# Allegro board IoT Moudle V2_0_1.brd
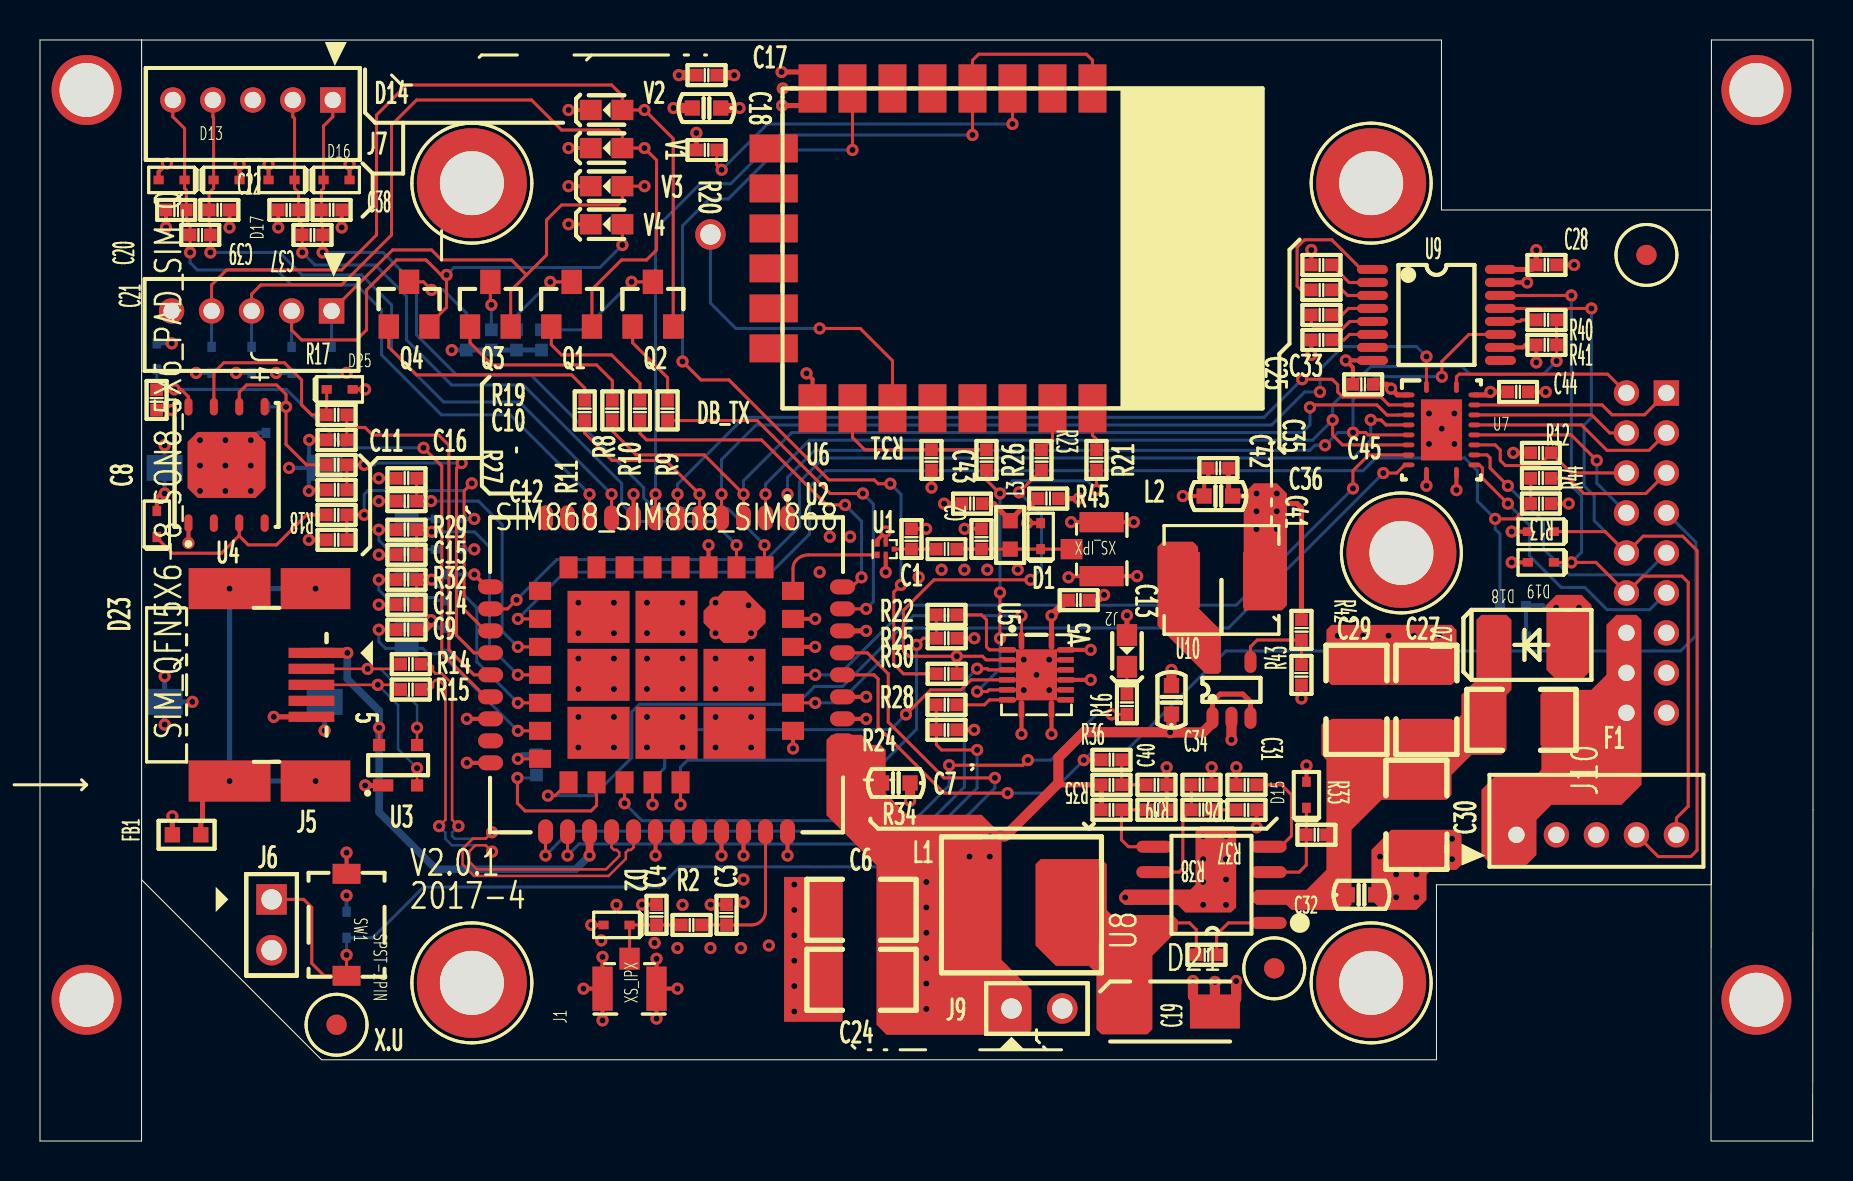
[diagram p0: board, top side]
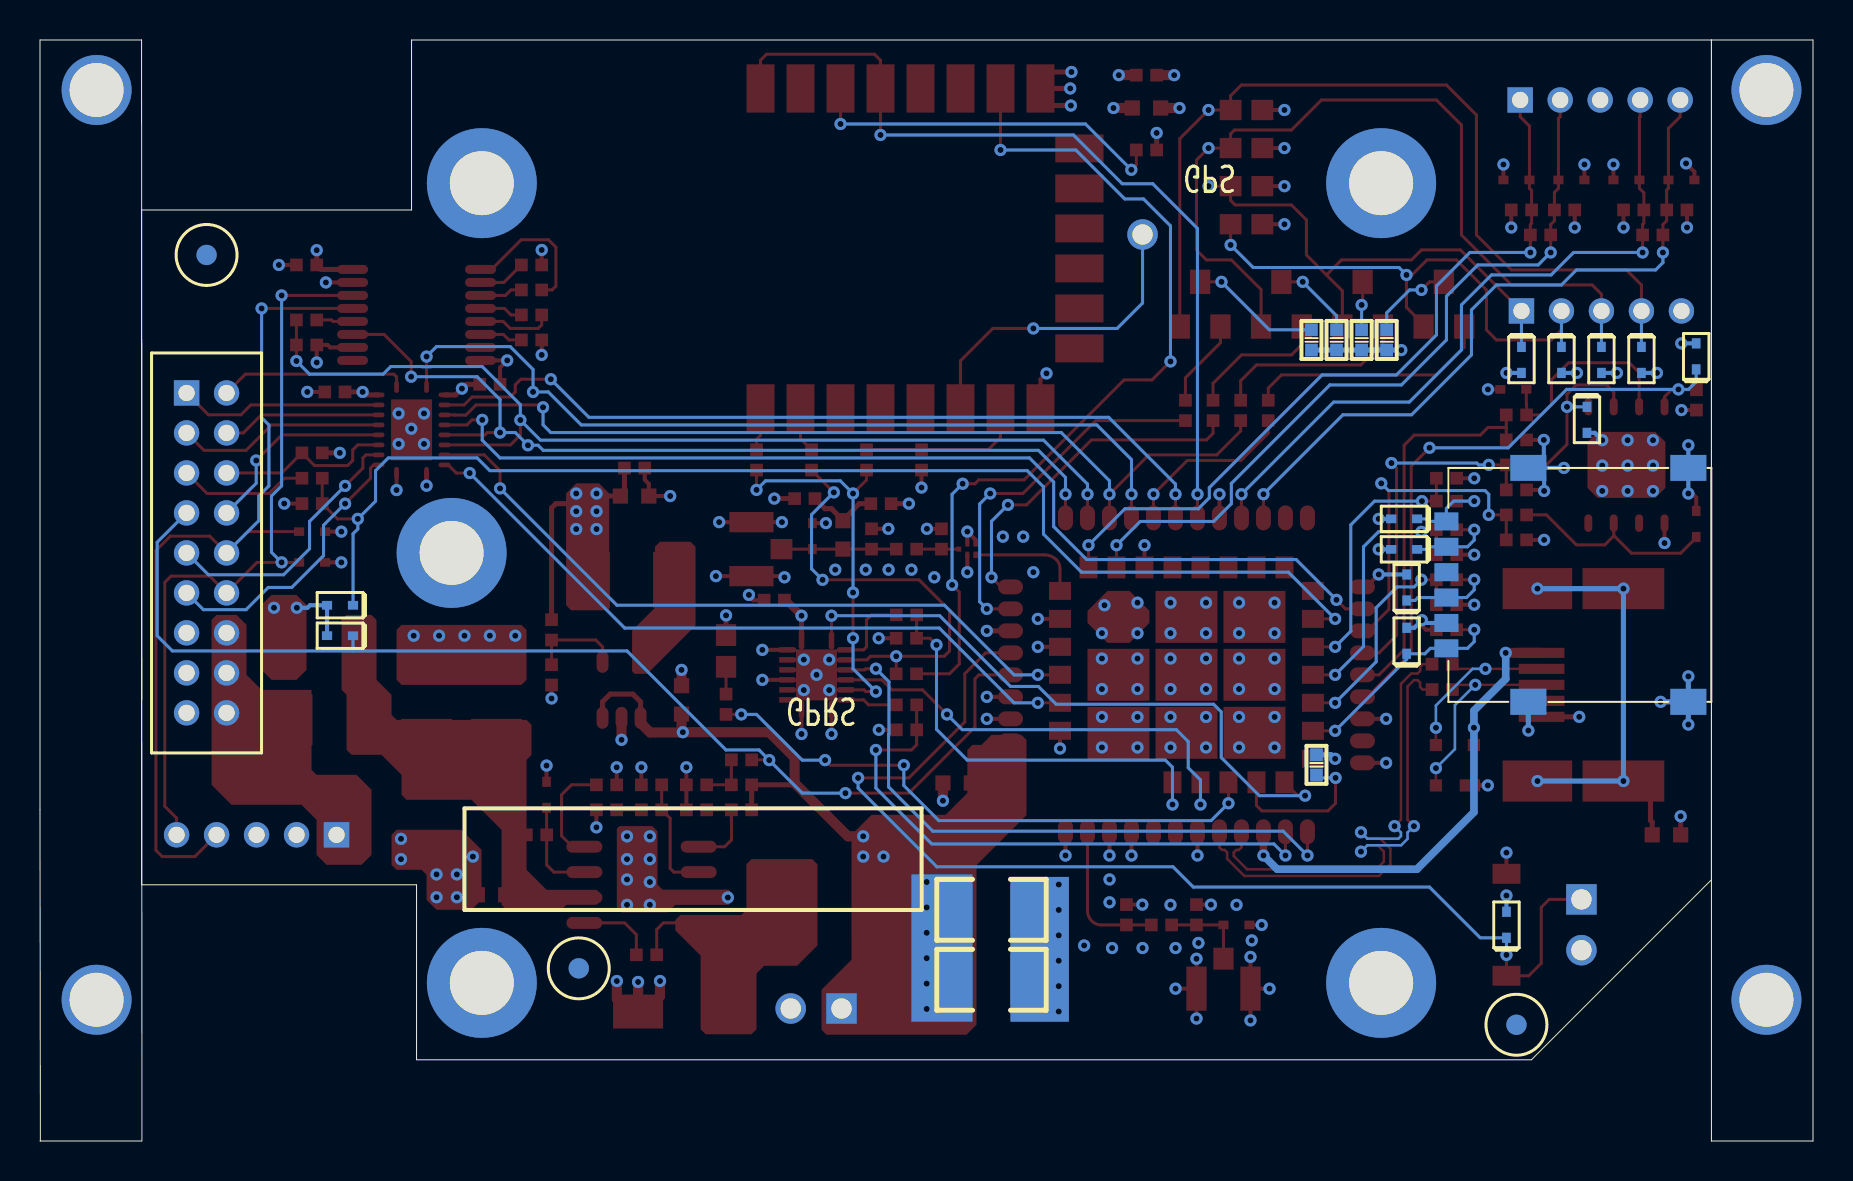
[diagram p1: board, bottom side, seen from below]

Outline 88.66 x 55.07 mm; copper layers: TOP, GND, VCC, BOTTOM. Coordinates in mm from the lower left corner of the outline.
Outline path: 83.57,0 83.58,55.07 88.66,55.07 88.66,16.56 88.65,0 ; 83.58,22.06 83.58,40.06 ; 88.66,0 83.58,0 ; 0,55.07 5.08,55.07 5.08,0 0,0 0,55.07 ; 5.08,55.07 5.08,13.06 14.08,4.06 69.83,4.06 69.83,12.81 83.58,12.81 83.58,46.57 70.08,46.57 70.08,55.07 5.08,55.07

## Design rules (mm)
constraint set DEFAULT: min track width 0.152
net group 1PPS: nets 1PPS N16896165
net group ADC_IN: nets ADC_IN N16862002
net group GPS_EN: nets GPS_EN N16835858
net group GPS_RXD: nets GPS_RXD N16866581
net group GSM_ANT: nets GSM_ANT N16829767
net group J_SIM2_C2: nets J_SIM2_C2 SIM2_RST
net group J_SIM2_C3: nets J_SIM2_C3 SIM2_CLK
net group J_SIM2_C7: nets J_SIM2_C7 SIM2_DATA
net group MIC_N: nets MIC_N MIC_P
net group N10748: nets N10748 N10896
net group N16846415: nets N16846415 N16846419
net group N16846461: nets N16846461 N16846465
net group N16847616: nets N16847616 N16847620
net group N16847724: nets N16847724 N16847850
net group NET_LIGHT: nets N18359 NET_LIGHT
net group PWR_STATUS: nets N18352 PWR_STATUS
net group SIM1_C2: nets SIM1_C2 SIM1_RST
net group SIM1_C3: nets SIM1_C3 SIM1_CLK
net group SIM1_C7: nets SIM1_C7 SIM1_DATA
net group SIM2_DET: nets N16956523 SIM2_DET
net group SPK2_N: nets SPK2_N SPK2_P
net group UART1_DCD: nets N16907222 UART1_DCD
net group UART1_RTS: nets N16906841 UART1_RTS
net group UART1_RX: nets N17025201 UART1_RX
net group UART2_RX: nets N16867085 UART2_RX
net group USB_DM: nets N16842026 USB_DM
net group USB_DP: nets N16842044 USB_DP
net group VCC_IN_F: nets N16847722 VCC_IN_F
net group WIFI_RXD: nets N16887179 N16887271 WIFI_RXD
net group WIFI_TXD: nets N16866018 N16887146 WIFI_TXD
nets with their own width: min track width 0.203; nets GND
nets with their own width: min track width 0.254; nets VCC_2V8 VCC_3V3 VCC_4V VCC_IN

## Placement (name value [footprint] x y rotation side)
C1  270  [C0402]  43.58 30.11 90 top
C2  270  [C0402]  47.08 30.11 90 top
C3  270  [C0402]  34.33 11.31 90 top
C4  270  [C0402]  30.83 11.31 90 top
C5  476  [C1210]  41.08 11.56 180 bottom
C6  476  [C1210]  41.08 11.56 180 top
C7  105  [C0603]  42.8 17.91 180 top
C8  104  [C0402]  5.83 37.07 270 top
C9  104  [C0402]  18.33 25.57 0 top
C10  220  [C0402]  14.83 32.57 0 top
C11  220  [C0402]  14.83 35.07 0 top
C12  220  [C0402]  14.83 30.07 0 top
C13  104  [C0402]  51.94 27.05 0 top
C14  220  [C0402]  18.33 26.82 0 top
C15  220  [C0402]  18.33 29.32 0 top
C16  220  [C0402]  18.33 33.15 0 top
C17  104  [C0402]  33.33 53.31 180 top
C18  106  [C0603]  33.33 51.66 180 top
C19  104  [C0402]  58.33 9.31 180 top
C20  330  [C0402]  6.81 46.57 180 top
C21  120  [C0402]  8.01 45.32 180 top
C22  330  [C0402]  8.97 46.57 0 top
C23  476  [C1210]  41.08 8.06 180 bottom
C24  476  [C1210]  41.08 8.06 180 top
C25  104  [C0402]  64.08 42.57 180 top
C26  104  [C0402]  60.33 17.81 180 top
C27  106  [C1210]  69.33 22.06 90 top
C28  104  [C0402]  75.33 43.82 0 top
C29  106  [C1210]  65.83 22.06 90 top
C30  106  [C1210]  68.83 16.31 270 top
C31  472  [C0402]  58.08 16.56 0 top
C32  104  [C0603]  66.08 12.31 0 top
C33  104  [C0402]  64.08 43.82 180 top
C34  390  [C0402]  58.08 17.81 0 top
C35  104  [C0402]  64.08 41.32 0 top
C36  104  [C0402]  64.08 40.07 180 top
C37  120  [C0402]  13.63 45.32 180 top
C38  330  [C0402]  14.58 46.57 0 top
C39  330  [C0402]  12.42 46.57 180 top
C40  106  [C0603]  56.58 22.06 90 top
C41  106  [C0603]  58.93 32.26 180 top
C42  104  [C0402]  58.93 33.66 180 top
C43  330  [C0402]  46.61 31.88 0 top
C44  104  [C0402]  73.91 37.47 0 top
C45  104  [C0402]  66.17 37.85 180 top
D1  ESD  [SOD-523]  50.04 30.25 90 top
D2  ESD  [SOD-523]  28.83 10.81 180 top
D4  ESD  [SOD-523]  14.58 39.07 270 bottom
D5  ESD  [SOD-523]  12.58 39.07 270 bottom
D6  ESD  [SOD-523]  10.58 39.07 270 bottom
D7  ESD  [SOD-523]  8.58 39.07 270 bottom
D8  ESD  [SOD-523]  20.32 25.02 90 bottom
D9  ESD  [SOD-523]  20.45 31.11 0 bottom
D10  ESD  [SOD-523]  15.33 10.81 90 bottom
D11  ESD  [SOD-523]  20.45 29.59 0 bottom
D12  ESD  [SOD-523]  20.32 27.69 90 bottom
D13  ESD  [SOD-523]  9.33 48.07 0 top
D14  ESD  [SOD-523]  6.58 48.07 180 top
D15  ESD  [SOD-523]  63.33 17.31 90 top
D16  ESD  [SOD-523]  14.83 48.07 0 top
D17  ESD  [SOD-523]  12.08 48.07 180 top
D18  ESD  [SOD-523]  75.06 30.48 180 top
D19  ESD  [SOD-523]  75.06 28.94 180 top
D20  ESD  [SOD-123]  74.58 24.82 0 top
D21  B340A  [SMA]  56.52 6.48 0 top
D22  ESD  [SOD-523]  5.84 39.24 90 bottom
D23  ESD  [SOD-523]  5.84 30.86 90 top
D24  ESD  [SOD-523]  11.3 36.07 270 bottom
D25  ESD  [SOD-523]  14.99 37.59 0 top
D26  ESD  [SOD-523]  73.66 25.27 0.2 bottom
D27  ESD  [SOD-523]  73.66 26.8 0 bottom
F1  SMD200  [F1210]  74.08 21.06 180 top
FB1  BLM18AG331SN1D  [L0603]  7.33 15.31 180 top
J1  XS_IPX  [IPX]  29.48 7.62 90 top
J2  XS_IPX  [IPX]  53.09 29.6 180 top
J3  CON2X9  [CON2X9-2R0-5R5X20]  81.33 37.41 180 bottom
J4  CON5  [CON1X5_2R0_HDR_SIP]  10.58 41.52 270 top
J5  MINI_USB  [CONN_USB_MINI_B_SMD]  9.83 22.81 270 top
J6  PWR_SW  [HDR_1X2]  11.58 12.08 270 top
J7  CON5  [CON1X5_2R0_HDR_SIP]  10.64 52.07 270 top
J9  PWR_SW  [HDR_1X2]  48.58 6.63 0 top
J10  CON5  [CON1X5_2R0_HDR_SIP]  77.83 15.31 90 top
J11  -  [SIM_NANO_12R1X14]  14.23 27.82 90 bottom
L1  6.8uH  [L2525]  49.08 11.81 180 top
L2  4.7uH  [L2020]  59.08 28.07 0 top
L3  27nH  [L0603]  48.51 30.31 90 top
NOREF  -  [unnamed]  14.83 5.81 0 top
NOREF#2  -  [unnamed]  80.33 44.32 0 top
NOREF#3  -  [#2]  67.58 4.06 90 top
NOREF#4  -  [#2]  66.57 7.91 90 top
NOREF#5  -  [#2]  21.6 7.91 90 top
NOREF#6  -  [unnamed#2]  21.6 7.91 0 top
NOREF#7  -  [#2]  0 55.12 0 top
NOREF#8  -  [#2]  21.6 47.91 0 top
NOREF#9  -  [#2]  5.08 14.81 0 top
NOREF#10  -  [unnamed#2]  66.57 47.91 0 top
NOREF#11  -  [#2]  0 0 90 top
NOREF#12  -  [#2]  4.58 66.57 0 top
NOREF#13  -  [unnamed]  21.6 47.91 0 top
NOREF#14  -  [#2]  63.25 4.06 90 top
NOREF#15  -  [#2]  68.08 29.41 0 top
NOREF#16  -  [unnamed]  61.72 8.64 0 top
NOREF#17  -  [#2]  5.08 12.31 0 top
NOREF#18  -  [unnamed]  68.08 29.41 0 top
NOREF#19  -  [unnamed#2]  66.57 7.91 0 top
NOREF#20  -  [unnamed]  80.33 44.32 180 bottom
NOREF#21  -  [unnamed#3]  2.33 52.57 180 bottom
NOREF#22  -  [unnamed]  61.72 8.64 180 bottom
NOREF#23  -  [unnamed#3]  85.83 52.57 180 bottom
NOREF#24  -  [unnamed]  14.83 5.81 180 bottom
NOREF#25  -  [unnamed#3]  2.33 7.06 180 bottom
NOREF#26  -  [unnamed#3]  85.83 7.06 180 bottom
Q1  DTC114TET1G  [SOT-23]  26.59 41.85 0 top
Q2  DTC114TET1G  [SOT-23]  30.65 41.85 0 top
Q3  DTC114TET1G  [SOT-23]  22.52 41.85 0 top
Q4  DTC114TET1G  [SOT-23]  18.46 41.85 0 top
R1  0  [R0402]  45.33 29.6 0 top
R2  0  [R0402]  32.58 10.81 180 top
R3  0  [R0402]  24.83 18.81 270 bottom
R4  102  [R0402]  23.83 40.07 270 bottom
R5  102  [R0402]  21.32 40.07 270 bottom
R6  102  [R0402]  25.08 40.07 270 bottom
R7  102  [R0402]  22.57 40.07 270 bottom
R8  1003  [R0402]  30 36.54 90 top
R9  1003  [R0402]  31.38 36.54 90 top
R10  1003  [R0402]  28.62 36.54 90 top
R11  1003  [R0402]  27.24 36.54 90 top
R12  102  [R0402]  75.06 33.15 0 top
R13  562  [R0402]  75.06 31.88 180 top
R14  220  [R0402]  18.54 23.85 180 top
R15  220  [R0402]  18.54 22.58 180 top
R16  102  [R0402]  54.36 21.84 90 top
R17  51R  [R0402]  14.83 36.32 0 top
R18  51R  [R0402]  14.83 31.32 180 top
R19  51R  [R0402]  14.83 33.82 0 top
R20  102  [R0402]  33.33 49.57 0 top
R21  0  [R0402]  52.83 34.07 270 top
R22  102  [R0402]  45.33 26.32 180 top
R23  0  [R0402]  50.08 34.07 270 top
R24  102  [R0402]  45.33 21.81 0 top
R25  562  [R0402]  45.34 25.15 180 top
R26  0  [R0402]  47.33 34.07 270 top
R27  51R  [R0402]  18.33 32 180 top
R28  562  [R0402]  45.33 20.56 180 top
R29  51R  [R0402]  18.33 30.57 0 top
R30  0  [R0402]  45.34 23.37 180 top
R31  1002  [R0402]  44.58 34.07 90 top
R32  51R  [R0402]  18.33 28.07 0 top
R33  1003  [R0402]  63.83 15.31 0 top
R34  1002  [R0402]  53.58 16.56 180 top
R35  1002  [R0402]  53.58 17.81 180 top
R36  000  [R0402]  53.58 19.06 0 top
R37  4992  [R0402]  60.33 16.56 180 top
R38  2491  [R0402]  55.83 16.56 180 top
R39  1002  [R0402]  55.83 17.81 180 top
R40  102  [R0402]  75.33 41.07 0 top
R41  562  [R0402]  75.33 39.82 0 top
R42  5623  [R0402]  63.08 25.57 270 top
R43  1003  [R0402]  63.08 23.31 90 top
R44  102  [R0402]  75.06 34.42 180 top
R45  100  [R0402]  50.42 32.13 0 top
SW1  SPST-2PIN  [SW_SPST_SMT_4X3X2]  15.33 10.81 270 top
TP1  DB_UART_TX  [TP_KEY_MINI]  33.53 45.34 0 top
U1  SAFFB1G56KB0F0A  [F_1109_5P]  42.29 29.6 180 top
U2  -  [SIM868]  31.33 23.31 270 top
U3  PRTR5V0U2X  [SOT-143B]  17.91 18.8 0 top
U4  SIM_QFN5X6-8  [SON8_5X6_PAD]  9.33 33.82 90 top
U5  SN74CBTLV3257RGY  [PVQFN16_4X3R5_PAD2R05X2R55]  49.83 23.31 270 top
U6  -  [ESP-12F]  49.13 44.64 270 top
U7  TXB0108RGYR  [RGY0020A]  70.08 35.57 0 top
U8  TPS54331D  [SO8N_6R0_1R27]  61.44 10.91 180 top
U9  MAX3232EUE  [SOP16-0R65-6R4]  69.83 41.32 0 top
U10  TPS62200DBV  [SOT23-5]  59.58 22.56 90 top
V1  V_LED  [V0603]  28.33 49.66 0 top
V2  V_LED  [V0603]  28.33 51.57 0 top
V3  V_LED  [V0603]  28.33 47.76 0 top
V4  V_LED  [V0603]  28.33 45.85 0 top
V5  V_LED  [V0603]  54.36 24.51 90 top

## Library data of the parts
C1 C2 = CAP_NP: signal model: DEFAULT_CAPACITOR_4.76e+014pF_2_1
C3 C4 = CAP_NP: signal model: DEFAULT_CAPACITOR_2.2e+014pF_2_1
C5 C7 C9 C11 C42 = CAP_NP: signal model: DEFAULT_CAPACITOR_1.06e+014pF_2_1
C6 C8 C10 C12-C19 C39-C41 = CAP_NP: signal model: DEFAULT_CAPACITOR_1.04e+014pF_2_1
C20-C22 = CAP_NP: signal model: DEFAULT_CAPACITOR_2.7e+014pF_2_1
C23 C24 C27 C29 C35 C36 = CAP_NP: signal model: DEFAULT_CAPACITOR_1.2e+014pF_2_1
C25 C26 C28 C33 C34 C37 C38 = CAP_NP: signal model: DEFAULT_CAPACITOR_3.3e+014pF_2_1
C30 C31 = CAP_NP: signal model: DEFAULT_CAPACITOR_4.77e+014pF_2_1
C32 = CAP_NP: signal model: DEFAULT_CAPACITOR_1.05e+014pF_2_1
C43-C45 = CAP_NP
D1 D2 D4-D20 D22-D27 = DIODE BREAKDOWN
D21 = V_DIODE
F1 = F_FUSE
FB1 R43-R45 = R2
J1 J2 = XS_IPX_0
J3 = XS_CON2X9
J4 J7 J10 = XS_CON5
J5 = XS_MINI_USB
J6 J9 = XS_CON2
J11 = SIM_NANO_10X12
L1 L3 = L
L2 = L: signal model: DEFAULT_INDUCTOR_6.800000nH_2_1
Q1-Q4 = NPN
R1-R5 R18 R20 R22 R24 R28-R33 = R2: signal model: DEFAULT_RESISTOR_102.000000OHM_2_1
R6 R7 R10-R13 R17 R25-R27 R34 R35 = R2: signal model: DEFAULT_RESISTOR_101.000000OHM_2_1
R8 R9 = R2: signal model: DEFAULT_RESISTOR_220.000000OHM_2_1
R14 R15 = R2: signal model: DEFAULT_RESISTOR_472.000000OHM_2_1
R16 R19 R21 R40 = R2: signal model: DEFAULT_RESISTOR_1002OHM_2_1
R23 R36 R37 = R2: signal model: DEFAULT_RESISTOR_0.001OHM_2_1
R38 = R2: signal model: DEFAULT_RESISTOR_5623OHM_2_1
R39 = R2: signal model: DEFAULT_RESISTOR_1003OHM_2_1
R41 = R2: signal model: DEFAULT_RESISTOR_4991OHM_2_1
R42 = R2: signal model: DEFAULT_RESISTOR_2491OHM_2_1
SW1 = S_PUSHBUTTON-SPST-2PIN
TP1 = TP_TEST-POINT
U1 = GPS_BPF_SAFFB1G56KB0F0A
U2 = SIM868
U3 = D_PRTR5V0U2X_0
U4 = SIM_QFN5X6-8
U5 = D_SN74CBTLV3257RGY_0
U6 = D_ESP_12F
U7 = D_TXB0108RGYR
U8 = N_PWR_TPS54331D
U9 = D_TRS_MAX3232EUE
U10 = N_PWR_ADP122_1
V1-V5 = V_LED

## Footprints (pads in the part's own frame, mm; a bottom-side part is the same pattern mirrored in y, then rotated)
C0402
  rect 0.635x0.635 smd: 1(-0.508,0) 2(0.508,0)
C0603
  rect 0.762x0.762 smd: 1(-0.711,0) 2(0.711,0)
C1210
  rect 1.524x2.54 smd: 1(-1.714,0) 2(1.714,0)
CON1X5_2R0_HDR_SIP
  rect 1.27x1.27 hole 0.813: 1(0,4)
  round 1.27 hole 0.813: 2(0,2) 3(0,0) 4(0,-2) 5(0,-4)
CON2X9-2R0-5R5X20
  rect 1.27x1.27 hole 0.813: 1(0,0)
  round 1.27 hole 0.813: 2(0,-1.999) 3(0,-4) 4(0,-6) 5(0,-8.001) 6(0,-10) 7(0,-11.999) 8(0,-14.001) 9(0,-16) 10(1.999,-16) 11(1.999,-14.001) 12(1.999,-11.999) 13(1.999,-10) 14(1.999,-8.001) 15(1.999,-6) 16(1.999,-4) 17(1.999,-1.999) 18(1.999,0)
CONN_USB_MINI_B_SMD
  rect 0.508x2.286 smd: 1(-1.6,3.742) 2(-0.8,3.742) 3(0,3.742) 4(0.8,3.742) 5(1.6,3.742)
  rect 2.057x3.479 smd: 6(4.812,3.949) 8(-4.812,3.949)
  rect 2.057x4.089 smd: 7(4.812,-0.351) 9(-4.812,-0.351)
ESP-12F
  rect 2.413x1.397 smd: 1(-8,3.5) 2(-8,1.5) 3(-8,-0.5) 4(-8,-2.5) 5(-8,-4.5) 6(-8,-6.5) 7(-8,-8.5) 8(-8,-10.5) 15(8,-10.5) 16(8,-8.5) 17(8,-6.5) 18(8,-4.5) 19(8,-2.5) 20(8,-0.5) 21(8,1.5) 22(8,3.5)
  rect 1.397x2.413 smd: 9(-5,-12.445) 10(-3,-12.445) 11(-1,-12.445) 12(1,-12.445) 13(3,-12.445) 14(5,-12.445)
F1210
  rect 1.524x2.54 smd: 1(-1.714,0) 2(1.714,0)
F_1109_5P
  rect 0.25x0.25 smd: 1(-0.425,0)
  rect 0.2x0.325 smd: 2(0,-0.288) 5(0,0.288)
  rect 0.25x0.325 smd: 3(0.425,-0.288) 4(0.425,0.288)
HDR_1X2
  rect 1.524x1.524 hole 1.016: 1(0,0)
  round 1.524 hole 1.016: 2(2.54,0)
IPX
  rect 2.21x1.016 smd: 1(0,1.35) 2(0,-1.35)
  rect 1.092x1.016 smd: 3(1.5,0)
L0603
  rect 0.762x0.762 smd: 1(-0.711,0) 2(0.711,0)
L2020
  rect 1.93x2.794 smd: 1(-2.045,0) 2(2.045,0)
L2525
  rect 3x3.429 smd: 1(-2.52,0) 2(2.52,0)
PVQFN16_4X3R5_PAD2R05X2R55
  custom 0.85x0.28 smd: 1(-1.69,-0.75) 8(1.69,-0.75) 9(1.69,0.75) 16(-1.69,0.75)
  custom 0.28x0.85 smd: 2(-1.25,-1.44) 3(-0.75,-1.44) 4(-0.25,-1.44) 5(0.25,-1.44) 6(0.75,-1.44) 7(1.25,-1.44) 10(1.25,1.44) 11(0.75,1.44) 12(0.25,1.44) 13(-0.25,1.44) 14(-0.75,1.44) 15(-1.25,1.44)
  rect 2.55x2.05 smd: 17(0,0)
R0402
  rect 0.635x0.635 smd: 1(-0.508,0) 2(0.508,0)
RGY0020A
  oval 0.24x0.6 smd: 1(-0.75,2.15) 10(-0.75,-2.15) 11(0.75,-2.15) 20(0.75,2.15)
  oval 0.6x0.24 smd: 2(-1.65,1.75) 3(-1.65,1.25) 4(-1.65,0.75) 5(-1.65,0.25) 6(-1.65,-0.25) 7(-1.65,-0.75) 8(-1.65,-1.25) 9(-1.65,-1.75) 12(1.65,-1.75) 13(1.65,-1.25) 14(1.65,-0.75) 15(1.65,-0.25) 16(1.65,0.25) 17(1.65,0.75) 18(1.65,1.25) 19(1.65,1.75)
  rect 2.05x3.05 smd: 21(0,0)
SIM868
  oval 1.25x0.75 smd: 1(-7.85,6.05) 2(-7.85,4.95) 3(-7.85,3.85) 4(-7.85,2.75) 5(-7.85,1.65) 6(-7.85,0.55) 7(-7.85,-0.55) 8(-7.85,-1.65) 9(-7.85,-2.75) 10(-7.85,-3.85) 11(-7.85,-4.95) 12(-7.85,-6.05) 22(7.85,-6.05) 23(7.85,-4.95) 24(7.85,-3.85) 25(7.85,-2.75) 26(7.85,-1.65) 27(7.85,-0.55) 28(7.85,0.55) 29(7.85,1.65) 30(7.85,2.75) 31(7.85,3.85) 32(7.85,4.95) 33(7.85,6.05)
  oval 0.75x1.25 smd: 13(-4.4,-8.8) 14(-3.3,-8.8) 15(-2.2,-8.8) 16(-1.1,-8.8) 17(0,-8.8) 18(1.1,-8.8) 19(2.2,-8.8) 20(3.3,-8.8) 21(4.4,-8.8) 34(4.4,8.8) 35(3.3,8.8) 36(2.2,8.8) 37(1.1,8.8) 38(0,8.8) 39(-1.1,8.8) 40(-2.2,8.8) 41(-3.3,8.8) 42(-4.4,8.8)
  rect 1.1x0.9 smd: 43(-5.375,4.9) 44(-5.375,3.5) 45(-5.375,2.1) 46(-5.375,0.7) 47(-5.375,-0.7) 48(-5.375,-2.1) 49(-5.375,-3.5) 50(-5.375,-4.9) 58(5.375,-4.9) 59(5.375,-3.5) 60(5.375,-2.1) 61(5.375,-0.7) 62(5.375,0.7)
  rect 0.9x1.1 smd: 51(-4.2,-6.325) 52(-2.8,-6.325) 53(-1.4,-6.325) 54(0,-6.325) 55(1.4,-6.325) 56(2.8,-6.325) 57(4.2,-6.325) 63(2.8,6.325) 64(1.4,6.325) 65(0,6.325) 66(-1.4,6.325) 67(-2.8,6.325) 68(-4.2,6.325)
  rrect 2.6x3.1 smd: 69(-2.9,3.4)
  rect 2.6x3.1 smd: 70(-2.9,0) 71(-2.9,-3.4) 72(0,-3.4) 73(2.9,-3.4) 74(2.9,0) 75(2.9,3.4) 76(0,3.4) 77(0,0)
SIM_NANO_12R1X14
  rect 1.3x1.8 smd: 1(-5.85,0) 2(5.85,0) 3(-5.85,-8) 4(5.85,-8)
  rect 0.9x1.2 smd: C1(-3.175,4.1) C2(-0.635,4.1) C3(1.905,4.1) C5(-1.905,4.1) C6(0.635,4.1) C7(3.175,4.1)
SMA
  rect 2.5x1.7 smd: 1(-2.24,0) 2(2.24,0)
SO8N_6R0_1R27
  oval 1.8x0.6 smd: 1(0,0) 2(0,-1.27) 3(0,-2.54) 4(0,-3.81) 5(5.715,-3.81) 6(5.715,-2.54) 7(5.715,-1.27) 8(5.715,0)
SOD-123
  rect 1.524x2.54 smd: 1(-1.849,0) 2(1.849,0)
SOD-523
  rect 0.508x0.432 smd: 1(-0.65,0) 2(0.65,0)
SON8_5X6_PAD
  oval 0.875x0.4 smd: 1(-2.912,1.905) 2(-2.912,0.635) 3(-2.912,-0.635) 4(-2.912,-1.905) 5(2.912,-1.905) 6(2.912,-0.635) 7(2.912,0.635) 8(2.912,1.905)
  rrect 3.3x3.9 smd: 9(0,0)
SOP16-0R65-6R4
  oval 1.549x0.45 smd: 1(-3.2,2.275) 2(-3.2,1.625) 3(-3.2,0.975) 4(-3.2,0.325) 5(-3.2,-0.325) 6(-3.2,-0.975) 7(-3.2,-1.625) 8(-3.2,-2.275) 9(3.2,-2.275) 10(3.2,-1.625) 11(3.2,-0.975) 12(3.2,-0.325) 13(3.2,0.325) 14(3.2,0.975) 15(3.2,1.625) 16(3.2,2.275)
SOT23-5
  oval 1.1x0.6 smd: 1(-1.4,0.95) 2(-1.4,0) 3(-1.4,-0.95) 4(1.4,-0.95) 5(1.4,0.95)
SOT-23
  rect 1.016x1.219 smd: 1(-1.016,-1.118) 2(1.016,-1.118) 3(0,1.118)
SOT-143B
  rect 1.016x0.61 smd: 1(-0.75,-1.01)
  rect 0.61x0.61 smd: 2(0.95,-1.01) 3(0.95,1.01) 4(-0.95,1.01)
SW_SPST_SMT_4X3X2
  rect 1x1.4 smd: 1(-2.55,0) 2(2.55,0)
TP_KEY_MINI
  round 1.524 hole 1.016: 1(0,0)
unnamed
  round 1.016 smd: 1(0,0)
unnamed#2
  round 5.5 hole 3.2: 1(0,0)
unnamed#3
  round 3.5 hole 2.7: 1(0,0)
V0603
  rect 1.092x1.016 smd: 1(-0.794,0) 2(0.794,0)

## Nets
GND: C1.2 C2.2 C3.2 C4.2 C5.2 C6.2 C7.1 C8.2 C9.2 C10.1 C11.1 C12.1 C13.2 C14.1 C15.1 C16.1 C17.2 C18.2 C20.2 C22.2 C23.2 C24.2 C26.2 C27.2 C28.2 C29.2 C30.2 C32.2 C33.2 C34.2 C36.2 C38.2 C39.2 C40.2 C41.2 C42.2 C43.1 C44.2 C45.2 D1.2 D2.2 D4.2 D5.2 D6.2 D7.2 D8.2 D9.2 D10.2 D11.2 D12.2 D13.2 D14.2 D15.2 D16.2 D17.2 D18.2 D19.2 D20.2 D21.2 D22.2 D23.2 D24.2 D25.2 D26.2 D27.2 FB1.2 J1.1 J1.2 J2.1 J2.2 J3.7 J3.8 J3.9 J4.5 J5.5 J6.2 J7.3 J9.2 J10.2 J10.3 J11.2 J11.4(SHILD4) J11.C5 R13.1 R25.1 R28.1 R31.1 R37.1 R38.1 R39.1 R41.1 R43.1 SW1.1 U1.2 U1.3 U1.5 U2.8 U2.13 U2.19 U2.21 U2.27 U2.30 U2.31 U2.33 U2.36 U2.37 U2.45 U2.63 U2.66 U2.67 U2.69 U2.70 U2.71 U2.72 U2.73 U2.74 U2.75 U2.76 U2.77 U3.1 U4.1 U4.9(PAD) U5.8 U5.9 U5.12 U5.15(\\O\E) U5.17 U6.15 U7.11 U7.21 U8.7 U9.8 U9.10 U9.15 U10.2 V1.1 V2.1 V3.1 V4.1
VCC_2V8: C45.1 U2.40 U7.2 U7.10 V5.2
VCC_3V3: C13.1 C17.1 C18.1 C28.1 C41.1 C42.1 C44.1 L2.2 R4.2 R5.2 R6.2 R7.2 R20.1 R42.1 R44.2 R45.2 U5.16 U6.8(VCC) U7.19(VCCB) U9.16(VCC)
VCC_4V: C5.1 C6.1 C7.2 C23.1 C24.1 C40.1 J9.1 L1.2 R34.2 R35.2 U2.34 U2.35 U10.1(VIN) U10.3
VCC_IN: F1.1 J3.10 J3.11 J3.12 J10.1
VCC_IN_F: C27.1 C29.1 C30.1 C32.1 D20.1(CATHODE) F1.2 R33.2 U8.2
1PPS: R16.1 U2.60
ADC_IN: D26.1(CATHODE) J3.4 R36.1 U2.38
GPS_ANT: U1.4(PORT2) U2.68
GPS_EN: R3.2 U2.59
GPS_RXD: R22.2 R25.2 U2.62
GPS_TXD: U2.61 U5.5
GPS_WIFI_SEL: U2.58 U5.1
GSM_ANT: C3.1 R2.1 U2.32
I2C_SCL: U2.65 U7.8
I2C_SCL_T: J3.5 U7.13
I2C_SDA: U2.64 U7.9
I2C_SDA_T: J3.6 U7.12
J_SIM2_C2: D12.1(CATHODE) J11.C2 R32.1
J_SIM2_C3: D11.1(CATHODE) J11.C3 R29.1
J_SIM2_C7: D9.1(CATHODE) J11.C7 R27.2
LED1: D4.1(CATHODE) J4.1 Q3.2(EMITTER) V3.2
LED2: D5.1(CATHODE) J4.2 Q4.2(EMITTER) V4.2
MIC_N: C20.1 C21.2 D14.1(CATHODE) J7.5 U2.10
MIC_P: C21.1 C22.1 D13.1(CATHODE) J7.4 U2.9
NET_LED: D7.1(CATHODE) J4.4 Q2.2(EMITTER) V2.2
NET_LIGHT: R9.1 U2.41
PWR_LED: D6.1(CATHODE) J4.3 Q1.2(EMITTER) V1.2
PWR_STATUS: R8.1 U2.42
PWRKEY_N: D10.1(CATHODE) J6.1 SW1.2 U2.39
RXD_RS232: D18.1(CATHODE) J3.14 J10.4 U9.13
SIM1_C2: D25.1(CATHODE) R17.1 U4.7
SIM1_C3: D24.1(CATHODE) R19.1 U4.6
SIM1_C7: D23.1(CATHODE) R18.2 U4.3
SIM1_CLK: C10.2 R19.2 U2.16
SIM1_DATA: C12.2 R18.1 U2.15
SIM1_DET: U2.14 U7.5
SIM1_DET_T: J3.2 U7.16
SIM1_RST: C11.2 R17.2 U2.17
SIM1_VDD: C8.1 D22.1(CATHODE) U2.18 U4.8
SIM2_CLK: C15.2 R29.2 U2.54
SIM2_DATA: C16.2 R27.1 U2.53
SIM2_DET: D27.1(CATHODE) R12.1 R13.2 U2.52
SIM2_RST: C14.2 R32.2 U2.55
SIM2_VDD: C9.1 D8.1(CATHODE) J11.C1 U2.56
SPK2_N: C37.1 C38.1 D16.1(CATHODE) J7.1 U2.43
SPK2_P: C37.2 C39.1 D17.1(CATHODE) J7.2 U2.44
TXD_RS232: D19.1(CATHODE) J3.13 J10.5 U9.14
UART1_CTS: U2.4 U7.1
UART1_CTS_T: J3.18 U7.20
UART1_DCD: R11.1 U2.5
UART1_DTR: U2.6 U7.3
UART1_DTR_T: J3.1 U7.18
UART1_RTS: R10.1 U2.3 U7.4
UART1_RTS_T: J3.17 U7.17
UART1_RX: R40.2 R41.2 U2.2 U7.7
UART1_RX_T: J3.16 R44.1 U7.14
UART1_TX: U2.1 U7.6 U9.11
UART1_TX_T: J3.15 U7.15
UART2_RX: R24.1 R28.2 U2.23
UART2_TX: U2.22 U5.4
USB_DM: R14.1 U2.26
USB_DP: R15.1 U2.25
USB_VBUS: J5.1 U2.24 U3.4(VCC)
WIFI_RST: U2.7 U6.1 U6.4
WIFI_RXD: R23.2 R30.1 U5.3
WIFI_TXD: R21.2 R26.2 U5.6
N10748: C1.1 R1.1 U1.1
N10896: C2.1 D1.1(CATHODE) J2.3 L3.1 R1.2
N18352: Q1.1 R8.2
N18359: Q2.1 R9.2
N18758: Q1.3 R4.1
N18762: Q2.3 R6.1
N16829767: C4.1 D2.1(CATHODE) J1.3 R2.2
N16835858: R3.1 U2.57
N16842007: FB1.1 J5.6 J5.7 J5.8 J5.9
N16842026: J5.2 R14.2 U3.3
N16842044: J5.3 R15.2 U3.2
N16846415: C25.1 U9.3
N16846419: C25.2 U9.1
N16846439: C33.1 U9.2
N16846461: C35.1 U9.5
N16846465: C35.2 U9.4
N16846467: C36.1 U9.6
N16847010: R20.2 U6.3
N16847616: C19.1 U8.1
N16847620: C19.2 D21.1(K) L1.1 U8.8
N16847722: D15.1(CATHODE) R33.1 U8.3
N16847724: C31.1 C34.1 U8.6
N16847764: C26.1 U8.4
N16847768: R34.1 R38.2 U8.5(VSENSE)
N16847850: C31.2 R37.2
N16848391: L2.1 U10.5
N16848451: R42.2 R43.2 U10.4
N16862002: R35.1 R36.2 R39.2
N16866018: R26.1 R31.2 U6.16
N16866581: R22.1 U5.2
N16867085: R24.2 U5.7
N16887146: R21.1 U6.22
N16887179: R23.1 U6.21
N16887271: R30.2 U6.7
N16887852: TP1.1(TP) U6.17
N16896165: R16.2 V5.1
N16906839: Q3.3 R7.1
N16906841: Q3.1 R10.2
N16907220: Q4.3 R5.1
N16907222: Q4.1 R11.2
N16956523: J3.3 R12.2
N17025201: R40.1 U9.12
N17037446: C43.2 L3.2 R45.1

Pads without a net: J5 4; J11 1 3 C6; NOREF 1; NOREF#2 1; NOREF#6 1; NOREF#10 1; NOREF#13 1; NOREF#16 1; NOREF#18 1; NOREF#19 1; NOREF#20 1; NOREF#21 1; NOREF#22 1; NOREF#23 1; NOREF#24 1; NOREF#25 1; NOREF#26 1; U2 11 12 20 28 29 46 47 48 49 50 51; U4 2 4 5; U5 10 11 13 14; U6 2 5 6 9 10 11 12 13 14 18 19 20; U9 7 9

## Via types
v1: diameter 0.61, hole 0.305, TOP to BOTTOM, 363 vias

## Routing (per net, layer and track width the routed paths; a pad name or vN(x,y) marks a point on that pad's centre or on a via; arc(x,y) is an arc through that point)
GND: length 157
  TOP w0.203: D25.2 v1(16.26,37.59) ; U2.66 v1(38.77,24.71) ; V2.1 v1(26.43,51.57) ; U5.8 v1(49.08,20.36) ; R13.1 v1(76.45,31.88) ; U1.5 42.29,28.45 v1(42.29,28.45) ; C26.2 v1(59.82,18.69) ; C1.2 v1(44.31,30.62) ; R37.1 v1(60.84,15.69) ; v1(51.43,28.19) 51.49,28.25 J2.1 v1(54.86,28.25) ; U2.27 v1(30.78,14.28) ; U2.13 22.34,27.71 v1(21.72,28.34) ; C11.1 v1(13.46,35.07) ; U5.9 v1(50.58,20.36) ; C33.2 v1(63.57,44.57) ; R25.1 v1(46.72,25.15) ; D19.2 v1(73.59,28.94) ; U1.2 v1(42.29,30.48) 41.87,30.06 U1.3 ; U2.21 v1(21.35,18.91) ; C28.2 v1(76.72,43.82) ; U6.15 38.63,38.09 v1(38.33,38.39) ; v1(30.83,6.13) J1.2 ; J1.2 v1(30.83,9.11) ; J1.2 v1(31.88,7.62) ; C39.2 v1(11.91,45.69) ; v1(51.56,30.95) J2.2 v1(54.7,30.95) ; C45.2 65.66,38.68 v1(65.3,39.04) U9.8 ; C15.1 v1(16.94,29.32) ; v1(56.34,18.69) R39.1 R38.1 ; U2.30 v1(34.08,14.28) ; C36.2 v1(63.57,39.32) ; C14.1 v1(16.94,26.82) ; D18.2 v1(73.59,30.48) ; J1.1 v1(27.18,7.62) ; J1.1 v1(28.13,6.03) ; J1.1 v1(28.13,9.21) ; V4.1 v1(26.43,45.85) ; U2.45 v1(33.43,29.8) ; D14.2 5.93,48.48 v1(6.35,48.9) ; D1.2 v1(49.36,30.9) ; V3.1 v1(26.43,47.76) ; C34.2 v1(58.59,18.69) ; D23.2 5.84,32.18 6.05,32.39 v1(6.23,32.39) ; v1(19.56,26.05) 19.56,25.78 19.35,25.57 C9.2 ; U2.31 v1(35.18,14.28) ; v1(74.83,38.94) R41.1 74.28,39.82 74.15,39.69 U9.10 ; C20.2 v1(6.3,45.69) ; U2.8 v1(29.68,32.35) ; C13.2 53.01,27.05 53.21,27.25 v1(53.21,27.31) ; U9.15 v1(74.37,42.94) ; SW1.1 v1(15.33,14.42) ; U2.33 v1(37.38,14.28) ; U2.67 v1(38.77,26.11) ; C4.2 v1(30.11,11.82) ; U7.11 v1(70.83,32.56) ; C10.1 13.5,32.57 v1(13.45,32.51) ; U5.12 v1(52.54,23.06) ; D2.2 v1(27.57,10.81) ; U2.63 v1(37.66,19.63) ; R28.1 v1(46.72,20.56) ; D13.2 v1(9.98,48.84) ; R43.1 v1(63.08,22.13) ; U5.15 v1(52.54,24.56) ; C12.1 v1(13.45,30.07) ; U2.36 v1(41.32,21.11) ; C42.2 58.42,33.07 58.22,32.87 C41.2 v1(57.15,32.26) ; C16.1 v1(16.94,33.15) ; V1.1 v1(26.43,49.66) ; U2.19 v1(21.35,21.11) ; R31.1 v1(44.58,32.68) ; D17.2 v1(11.43,48.84) ; U4.1 v1(7.43,29.91) ; U2.37 v1(41.32,22.21) ; D16.2 v1(15.48,48.84) ; D15.2 v1(63.33,18.78) ; C44.2 v1(75.3,37.47) ; C38.2 v1(15.09,45.69) ; C22.2 v1(9.48,45.69) ; C8.2 v1(6.58,36.56) ; C3.2 v1(33.54,11.82) ; C2.2 v1(46.24,30.62)
  TOP w0.254: C43.1 v1(45.21,31.88) ; FB1.2 v1(6.62,16.24) ; U3.1 v1(16.26,17.79) ; J5.5 v1(11.69,21.22)
  TOP w0.508: v1(57.66,8) 57.66,7.24 58.42,6.48 D21.2 ; U8.7 v1(54.27,12.18) ; C17.2 v1(31.95,53.31) ; C18.2 v1(31.68,51.66) ; C7.1 v1(43.51,17.02) ; D21.2 v1(58.76,7.96) ; D21.2 59.18,6.48 59.82,7.11 v1(59.82,8) ; U10.2 v1(59.58,20.07) ; C40.2 v1(56.58,23.56)
  GND w0.203: 50.18,6.63 J9.2 ; J9.2 51.12,5.69 ; J9.2 52.06,6.63 ; J9.2 51.12,7.57 ; J6.2 11.58,10.48 ; J6.2 11.58,8.6 ; J6.2 12.52,9.54 ; J6.2 10.64,9.54 ; J3.7 81.33,26.16 ; J3.7 82.08,25.42 ; J3.7 81.33,24.67 ; J3.7 80.58,25.42 ; 75.08,15.31 J10.2 ; J10.2 76.58,15.31 ; J10.2 75.83,16.06 ; J10.2 75.83,14.57 ; J7.3 10.64,52.82 ; J7.3 10.64,51.32 ; J7.3 9.89,52.07 ; J7.3 11.39,52.07 ; J4.5 6.58,42.27 ; J4.5 6.58,40.77 ; J4.5 7.33,41.52 ; 80.58,21.41 J3.9 ; J3.9 81.33,22.16 ; J3.9 82.08,21.41 ; J3.9 81.33,20.67 ; J3.8 82.08,23.41 ; J3.8 81.33,22.66 ; J3.8 81.33,24.16 ; J3.8 80.58,23.41 ; 77.08,15.31 J10.3 ; J10.3 77.83,14.57 ; J10.3 78.58,15.31 ; J10.3 77.83,16.06
  BOTTOM w0.203: v1(6.23,34.8) J11.4 v1(6.23,32.39) ; 13.98,33.67 13.46,33.15 13.46,33.11 13.45,33.1 v1(13.45,32.51) ; 13.98,33.67 13.96,33.67 ; 13.98,33.67 J11.2 ; D26.2 D27.2 75.16,26.8 75.29,26.67 v1(75.82,26.67) ; 13.96,33.67 13.46,34.16 v1(13.46,35.07) ; 13.96,33.67 v1(12.46,33.67) ; D24.2 10.91,35.42 v1(10.54,35.05) ; D5.2 v1(11.81,38.42) ; D6.2 v1(9.81,38.42) ; D22.2 v1(6.59,39.89) ; D11.2 v1(21.72,29.59) ; D12.2 v1(21.72,28.34) ; D8.2 19.94,25.67 v1(19.56,26.05) 19.42,25.91 J11.C5 ; D7.2 v1(7.81,38.42) ; D9.2 v1(21.72,31.11) ; D4.2 v1(15.33,38.42) ; D10.2 v1(15.33,12.28)
  vias: v1(8,35.05) v1(8,33.78) v1(8,32.51) v1(9.27,35.05) v1(9.27,33.78) v1(9.27,32.51) v1(10.54,33.78) v1(10.54,32.51) v1(26.92,26.92) v1(26.92,25.4) v1(26.92,24.13) v1(26.92,22.61) v1(26.92,21.21) v1(26.92,19.69) v1(28.07,10.03) v1(28.7,26.92) v1(28.7,25.4) v1(28.7,24.13) v1(28.7,22.61) v1(28.7,21.21) v1(28.7,19.69) v1(28.83,11.81) v1(30.35,26.92) v1(30.35,25.4) v1(30.35,24.13) v1(30.35,22.61) v1(30.35,21.21) v1(30.35,19.69) v1(30.73,9.91) v1(31.88,9.65) v1(32.13,26.92) v1(32.13,25.4) v1(32.13,24.13) v1(32.13,22.61) v1(32.13,21.21) v1(32.13,19.69) v1(32.13,11.81) v1(33.53,9.65) v1(33.78,26.92) v1(33.78,25.4) v1(33.78,24.13) v1(33.78,22.61) v1(33.78,21.21) v1(33.78,19.69) v1(35.05,9.65) v1(35.18,13.08) v1(35.18,11.94) v1(35.43,26.8) v1(35.56,25.4) v1(35.56,24.13) v1(35.56,22.61) v1(35.56,21.21) v1(35.56,19.69) v1(36.45,9.78) v1(37.72,12.83) v1(37.72,11.56) v1(37.72,10.29) v1(37.72,9.02) v1(37.72,7.75) v1(37.72,6.48) v1(38.99,28.45) v1(39.5,30.23) v1(40.51,30.23) v1(43.94,28.19) v1(45.09,28.57) v1(46.23,28.57) v1(47.37,28.57) v1(48.89,28.57) v1(49.2,24.08) v1(49.2,22.55) v1(49.83,23.31) v1(50.47,24.08) v1(50.47,22.55) v1(58.17,15.24) v1(58.17,14.1) v1(58.17,12.95) v1(58.17,11.81) v1(59.31,15.24) v1(59.31,14.1) v1(59.31,13.08) v1(59.31,11.81) v1(64.9,25.27) v1(66.17,25.27) v1(67.01,14.22) v1(67.44,25.27) v1(67.82,13.34) v1(67.82,12.19) v1(68.71,25.27) v1(68.83,13.34) v1(68.83,12.19) v1(69.46,36.39) v1(69.46,34.86) v1(69.98,25.27) v1(70.1,35.63) v1(70.61,15.11) v1(70.61,14.1) v1(70.73,36.39) v1(70.73,34.86) v1(76.96,26.67)
VCC_2V8: length 43.3
  TOP w0.254: C45.1 67.35,37.85 v1(67.56,37.63) 67.88,37.32 U7.2 ; U7.10 v1(69.33,32.77) ; V5.2 v1(54.36,26.29) ; U2.40 v1(41.32,25.51)
  VCC w0.381: 66.87,35.25 63.88,32.26 63.88,28.7 61.47,26.29 v1(54.36,26.29) 51.56,26.29 50.8,27.05 48.77,27.05 48.26,26.54 42.34,26.54 v1(41.32,25.51) ; 66.87,35.25 67.56,35.94 v1(67.56,37.63) ; 66.87,35.25 67.31,34.81 67.31,34.8 v1(69.33,32.77)
VCC_3V3: length 31.1
  TOP w0.254: v1(60.83,32.39) 60.71,32.26 C41.1 59.44,32.46 C42.1 ; v1(37.08,53.47) 38.23,53.47 38.63,53.06 U6.8 ; v1(37.11,51.79) 38.45,51.79 38.63,51.97 U6.8 ; C44.1 v1(72.53,37.47) 72.38,37.32 U7.19 ; U9.16 74.6,43.59 C28.1 v1(74.83,44.55) ; R42.1 63.08,31.66 62.86,31.88 62.1,31.88 ; U6.8 v1(37.15,52.64) ; U5.16 v1(50.58,26.27) ; R20.1 v1(32.82,50.42) ; 74.55,34.42 v1(73.67,34.42) ; R45.2 v1(51.94,32.13)
  TOP w0.381: C13.1 51.36,27.05 v1(50.58,26.27)
  TOP w0.508: C17.1 v1(34.72,53.31) ; C18.1 v1(34.98,51.66)
  BOTTOM w0.254: v1(20.59,39.56) R5.2 R7.2 R4.2 R6.2
  vias: v1(60.83,31.5) v1(60.83,30.61) v1(61.85,32.39) v1(61.85,31.5) v1(61.85,30.61)
VCC_4V: length 22.6
  TOP w0.254: U10.3 60.53,21.97 60.15,22.35 59.02,22.35 58.63,21.97 U10.1 ; 50.93,17.91 51.02,17.81 R35.2 R34.2
  TOP w0.508: 56.58,20.51 v1(56.52,20.45) 52.2,20.45 50.93,19.18 50.93,17.91 48.26,15.24 v1(47.5,15.24) ; 56.58,20.51 56.66,20.43 58.15,20.43 58.63,20.91 U10.1 ; 56.58,20.51 C40.1
  vias: v1(44.32,12.95) v1(44.32,11.68) v1(44.32,10.41) v1(44.32,9.14) v1(44.32,7.87) v1(44.32,6.6) v1(46.48,14.22) v1(47.5,14.22)
1PPS: length 29.3
  TOP w0.152: v1(49.4,19.05) 49.15,18.8 v1(45.47,18.8) ; v1(53.59,21.34) R16.1 ; U2.60 v1(29.23,16.89)
  BOTTOM w0.152: v1(45.47,18.8) 45.47,17.78 43.71,16.02 30.1,16.02 v1(29.23,16.89) ; v1(49.4,19.05) 50.55,19.05 52.83,21.34 v1(53.59,21.34)
ADC_IN: length 58.2
  TOP w0.152: U2.38 41.71,23.31 41.91,23.11 41.91,20.7 45.21,17.4 v1(48.39,17.4) ; v1(52.2,19.05) 52.21,19.06 R36.1
  BOTTOM w0.152: D26.1 73.01,24.53 73.02,24.51 ; J3.4 82.8,29.94 82.8,25.27 82.04,24.51 73.02,24.51 ; 73.02,24.51 59.31,24.51 54.36,19.56 52.7,19.56 v1(52.2,19.05) 50.55,17.4 v1(48.39,17.4)
GPS_ANT: length 5.7
  TOP w0.152: U1.4 38.44,29.32 arc(38.11,29.25) 37.83,29.07 arc(37.7,28.87) 37.66,28.64 U2.68
GPS_EN: length 7.7
  TOP w0.152: U2.59 27.83,16.78 27.56,16.51 24.26,16.51 23.88,16.89 v1(23.88,18.16)
  BOTTOM w0.152: R3.2 24.69,18.16 v1(23.88,18.16)
GPS_RXD: length 22.1
  TOP w0.152: R22.2 R25.2 44.16,25.15 v1(43.83,24.82) ; U2.62 v1(32.03,16.83)
  BOTTOM w0.152: v1(32.03,16.83) 32.03,18.7 32.38,19.05 42.29,19.05 43.83,20.59 v1(43.83,24.82)
GPS_TXD: length 22.9
  TOP w0.152: v1(43.31,21.34) 44.54,22.56 46.06,22.56 46.56,23.06 U5.5 ; U2.61 v1(30.63,16.83)
  BOTTOM w0.152: v1(43.31,21.34) 42.55,20.57 31.84,20.57 31.24,19.98 31.24,18.67 30.63,18.06 v1(30.63,16.83)
GPS_WIFI_SEL: length 31.3
  TOP w0.152: U2.58 25.76,17.27 v1(25.4,17.27) ; U5.1 v1(49.08,26.27)
  BOTTOM w0.152: v1(49.08,26.27) 43.67,26.27 40.13,22.73 38.73,22.73 37.85,21.84 29.97,21.84 29.59,21.46 29.59,19.18 27.69,17.27 v1(25.4,17.27)
GSM_ANT: length 7.6
  TOP w0.152: U2.32 36.28,11.51 arc(36.08,11.01) 35.58,10.81 C3.1 R2.1
I2C_SCL: length 35.9
  TOP w0.152: v1(65.66,32.64) 65.66,33.53 66.45,34.32 U7.8 ; U2.65 v1(38.77,23.31)
  BOTTOM w0.152: v1(65.66,32.64) 59.81,26.8 43.43,26.8 39.95,23.31 v1(38.77,23.31)
I2C_SCL_T: length 13.6
  TOP w0.152: U7.13 72.36,34.32 72.52,34.16 72.52,33.66 v1(73.41,32.77)
  BOTTOM w0.152: v1(73.41,32.77) 75.18,30.99 75.18,29.62 76.48,28.32 80.24,28.32 J3.5
I2C_SDA: length 35.7
  TOP w0.152: U2.64 v1(38.77,21.91) ; U7.9 68.25,33.82 67.85,33.41 v1(67.18,33.41)
  BOTTOM w0.152: v1(67.18,33.41) 59.42,25.65 43.69,25.65 39.95,21.91 v1(38.77,21.91)
I2C_SDA_T: length 14.1
  TOP w0.152: v1(73.41,31.88) 72.14,33.15 72.14,33.66 71.98,33.82 U7.12
  BOTTOM w0.152: J3.6 80.49,26.58 78.36,26.58 77.25,27.69 76.07,27.69 74.49,29.27 74.49,30.8 v1(73.41,31.88)
J_SIM2_C2: length 5
  TOP w0.152: R32.1 v1(16.94,28.07)
  BOTTOM w0.152: v1(16.94,28.07) 16.94,27.57 17.33,27.18 J11.C2 19.76,27.18 19.9,27.04 D12.1
J_SIM2_C3: length 4.4
  TOP w0.152: R29.1 v1(16.94,30.57)
  BOTTOM w0.152: D11.1 19.3,29.59 19.17,29.72 J11.C3 17.28,29.72 16.94,30.05 v1(16.94,30.57)
J_SIM2_C7: length 4.6
  TOP w0.152: R27.2 v1(16.94,32)
  BOTTOM w0.152: v1(16.94,32) 17.97,32 18.33,31.64 J11.C7 19.21,30.99 19.34,31.11 D9.1
LED1: length 25.4
  TOP w0.152: J4.1 17.63,44.57 19.58,44.57 20.08,44.07 23.58,44.07 24.33,43.32 ; Q3.2 23.54,42.52 24.33,43.32 ; 24.33,43.32 25.33,44.32 25.33,46.07 26.08,46.82 28.9,46.82 29.12,47.05 V3.2 v1(30.23,47.76)
  BOTTOM w0.152: D4.1 14.58,40.17 14.58,40.17 J4.1
LED2: length 27.2
  TOP w0.152: Q4.2 19.47,40.84 20.33,41.69 v1(20.33,43.32) 20.06,43.32 19.31,44.07 17.83,44.07 16.33,42.57 16.33,40.57 15.83,40.07 13.08,40.07 12.58,40.57 J4.2 ; V4.2 v1(29.12,44.82)
  BOTTOM w0.152: J4.2 12.58,40.17 12.58,40.17 D5.1 ; v1(20.33,43.32) 20.7,43.69 28,43.69 v1(29.12,44.82)
MIC_N: length 35.8
  TOP w0.152: J7.5 6.64,51.23 7.23,50.64 D14.1 7.23,47.65 7.32,47.56 C20.1 7.32,46.02 7.51,45.84 C21.2 v1(7.51,44.44) ; U2.10 v1(27.48,32.35)
  BOTTOM w0.152: v1(7.51,44.44) 7.51,43.93 7.87,43.57 11.83,43.57 12.58,42.82 15.83,42.82 17.08,41.57 17.08,39.32 20.07,36.32 23.51,36.32 v1(27.48,32.35)
MIC_P: length 35.3
  TOP w0.152: U2.9 v1(28.58,32.35) ; J7.4 8.64,51.23 8.68,51.19 D13.1 8.68,47.65 8.46,47.43 C22.1 8.46,45.9 8.52,45.84 C21.1 v1(8.52,44.44)
  BOTTOM w0.152: v1(8.52,44.44) 11.97,44.44 13.1,43.32 16.08,43.32 17.58,41.82 17.58,39.57 20.19,36.96 23.97,36.96 v1(28.58,32.35)
Net_116: length 1.4
  BOTTOM w0.254: 14.23,21.97 v1(14.23,20.53)
Net_117: length 3.8
  BOTTOM w0.254: 6.23,21.97 v1(6.23,23.24) ; 6.23,21.97 v1(7.62,21.97) ; 6.23,21.97 v1(6.23,20.83)
NET_LED: length 44.8
  TOP w0.152: Q2.2 31.67,50.13 v1(30.23,51.57) V2.2 29.12,52.28 28.59,52.82 18.33,52.82 16.83,51.32 16.83,45.32 15.08,43.57 9.33,43.57 8.58,42.82 J4.4
  BOTTOM w0.152: D7.1 8.58,40.17 8.58,40.17 J4.4 8.58,41.57
NET_LIGHT: length 18.6
  TOP w0.152: R9.1 35.86,36.03 39.51,32.39 v1(41.15,32.39) ; U2.41 v1(41.32,26.61)
  BOTTOM w0.152: v1(41.15,32.39) 41.67,31.86 41.67,26.97 v1(41.32,26.61)
PWR_LED: length 42.2
  TOP w0.152: Q1.2 27.6,42.59 29.08,44.07 30.33,44.07 30.83,44.57 30.83,49.06 v1(30.23,49.66) V1.2 29.12,50.37 28.93,50.57 26.08,50.57 24.58,52.07 18.83,52.07 17.58,50.82 17.58,45.32 15.08,42.82 11.04,42.82 10.58,42.35 J4.3
  BOTTOM w0.152: D6.1 J4.3
PWR_STATUS: length 17.5
  TOP w0.152: v1(41.08,28.19) 40.6,27.71 U2.42 ; R8.1 30,35.39 30.33,35.07 36.08,35.07 39.33,31.82 v1(40.26,31.82)
  BOTTOM w0.152: v1(41.08,28.19) 41.08,30.99 v1(40.26,31.82)
PWRKEY_N: length 56.5
  TOP w0.152: J6.1 13.19,12.08 13.59,11.68 13.59,8.89 14.21,8.26 SW1.2 v1(15.33,9.31) ; U2.39 41.37,24.41 42.42,23.37 42.42,20.95 45.21,18.16 v1(47.75,18.16)
  BOTTOM w0.152: v1(47.75,18.16) 47.75,17.65 43.81,13.72 32,13.72 30.99,12.7 19.18,12.7 16.64,10.16 D10.1 v1(15.33,9.31)
RXD_RS232: length 44.7
  TOP w0.152: D18.1 78.27,30.48 J3.14 80.17,30.25 82.14,30.25 82.87,29.53 82.87,14.54 82.55,14.22 80.92,14.22 J10.4 ; U9.13 v1(77.58,41.64)
  BOTTOM w0.152: v1(77.58,41.64) 77.58,36.18 77.22,35.81 77.22,32.77 77.72,32.26 77.72,31.02 J3.14
SIM1_C2: length 10.6
  TOP w0.152: D25.1 14.34,36.85 14.32,36.84 R17.1 13.58,36.32 13.08,36.82 13.08,38.07 12.22,38.92 9.19,38.92 8.7,38.43 U4.7
SIM1_C3: length 9.4
  TOP w0.152: R19.1 13.33,33.82 12.3,34.84 v1(12.3,36.72) 12.3,37.34 11.83,37.82 10.33,37.82 9.97,37.45 U4.6
  BOTTOM w0.152: D24.1 v1(12.3,36.72)
SIM1_C7: length 10.6
  TOP w0.152: D23.1 5.84,30.17 6.62,29.4 9.08,29.4 9.94,30.26 9.97,30.26 ; R18.2 13.33,31.32 11.83,29.82 10.41,29.82 9.97,30.26 ; 9.97,30.26 U4.3
SIM1_CLK: length 17.8
  TOP w0.152: v1(16.21,33.82) R19.2 C10.2 ; U2.16 21.7,24.41 20.83,25.29 20.83,33.66 v1(21.08,33.91)
  BOTTOM w0.152: v1(21.08,33.91) 16.82,33.91 16.72,33.82 v1(16.21,33.82)
SIM1_DATA: length 17
  TOP w0.152: v1(21.59,32.89) 21.21,32.51 21.21,26.59 22.28,25.51 U2.15 ; v1(16.21,31.32) R18.1 C12.2
  BOTTOM w0.152: v1(16.21,31.32) 16.21,32.34 16.4,32.53 21.23,32.53 v1(21.59,32.89)
SIM1_DET: length 51.8
  TOP w0.152: v1(66.55,36.07) 67.06,36.07 67.31,35.82 U7.5 ; v1(23.83,27.07) 23.38,26.61 U2.14
  BOTTOM w0.152: v1(66.55,36.07) 66.55,35.05 65.66,34.16 39.18,34.16 37.97,32.96 37.97,30.73 36.32,29.08 25.85,29.08 v1(23.83,27.07)
SIM1_DET_T: length 10.5
  TOP w0.152: J3.2 80.46,34.54 78.36,34.54 77.09,35.82 U7.16
SIM1_RST: length 19.6
  TOP w0.152: 15.34,35.69 R17.2 ; 15.34,35.69 16.26,35.69 16.64,35.31 19.94,35.31 20.45,34.8 20.45,24.57 21.7,23.31 U2.17 ; 15.34,35.69 C11.2
SIM1_VDD: length 31.6
  TOP w0.152: U2.18 22.28,22.21 20.09,24.4 20.09,33.76 v1(19.18,34.67) ; U4.8 7.43,37.22 7.05,37.59 v1(6.73,37.59) 6.71,37.57 C8.1
  BOTTOM w0.152: v1(19.18,34.67) 15.24,34.67 12.32,37.59 v1(6.73,37.59) 6.22,37.59 5.84,37.97 D22.1
SIM2_CLK: length 13.3
  TOP w0.152: v1(19.58,30.47) 19.56,30.47 19.45,30.57 R29.2 C15.2 ; U2.54 v1(23.9,23.31)
  BOTTOM w0.152: v1(19.58,30.47) 21.73,30.47 22.48,29.72 22.48,24.73 v1(23.9,23.31)
SIM2_DATA: length 13.4
  TOP w0.152: U2.53 v1(23.9,24.71) ; C16.2 R27.1 v1(19.56,32)
  BOTTOM w0.152: v1(23.9,24.71) 23.11,25.5 23.11,30.82 21.93,32 v1(19.56,32)
SIM2_DET: length 64.6
  TOP w0.152: 74.55,33.15 74.55,31.88 73.78,31.11 v1(72.77,31.11) ; U2.52 v1(23.9,26.11)
  BOTTOM w0.152: D27.1 73.01,30.37 72.77,30.61 v1(72.77,31.11) 71.88,32 71.88,33.53 71.25,34.16 66.8,34.16 66.17,33.53 39.29,33.53 38.48,32.71 38.48,30.35 36.58,28.45 26.23,28.45 v1(23.9,26.11)
SIM2_RST: length 11.6
  TOP w0.152: C14.2 R32.2 v1(19.58,28.07) ; U2.55 v1(23.9,21.91)
  BOTTOM w0.152: v1(19.58,28.07) 19.94,27.71 20.8,27.71 21.84,26.67 21.84,23.97 v1(23.9,21.91)
SIM2_VDD: length 11.5
  TOP w0.152: U2.56 v1(23.9,20.51) ; C9.1 v1(16.94,25.57)
  BOTTOM w0.152: v1(16.94,25.57) 16.94,24.97 17.28,24.64 J11.C1 19.14,24.64 19.41,24.37 D8.1 20.32,24.09 v1(23.9,20.51)
SPK2_N: length 38.9
  TOP w0.152: J7.1 14.64,51.23 14.18,50.77 D16.1 14.18,47.65 14.07,47.54 C38.1 14.07,45.9 14.13,45.84 C37.1 v1(14.13,44.44) ; U2.43 v1(36.23,29.8)
  BOTTOM w0.152: v1(14.13,44.44) 17.16,44.44 18.83,42.76 18.83,40.32 20.83,38.32 24.55,38.32 30.19,32.68 30.19,32.17 30.73,31.62 34.41,31.62 v1(36.23,29.8)
SPK2_P: length 38.6
  TOP w0.152: U2.44 v1(34.83,29.8) ; v1(13.12,44.44) C37.2 13.12,45.84 12.93,46.02 C39.1 12.93,47.45 12.73,47.65 D17.1 12.73,51.14 12.64,51.23 J7.2
  BOTTOM w0.152: v1(13.12,44.44) 13.74,43.82 16.76,43.82 18.33,42.25 18.33,40.07 20.58,37.82 24.16,37.82 29.09,32.89 29.09,31.87 29.97,30.99 33.64,30.99 v1(34.83,29.8)
TXD_RS232: length 38
  TOP w0.152: U9.14 74.58,42.29 74.58,42.29 v1(76.58,42.29) ; J10.5 81.83,16.15 82.42,16.74 82.42,27.94 82.11,28.25 80.17,28.25 J3.13 77.81,28.94 v1(76.58,28.94) D19.1
  BOTTOM w0.152: v1(76.58,28.94) 77.09,29.45 77.09,32.26 76.58,32.77 v1(76.58,42.29)
UART1_CTS: length 42.9
  TOP w0.152: U2.4 v1(34.08,32.35) ; U7.1 v1(69.33,39.23)
  BOTTOM w0.152: v1(34.08,32.35) 34.08,34.08 35.81,35.81 61.6,35.81 63.25,37.47 v1(64.01,37.47) 64.01,38.59 65.15,39.73 68.83,39.73 v1(69.33,39.23)
UART1_CTS_T: length 9.4
  TOP w0.152: U7.20 70.83,38.22 70.97,38.35 78.39,38.35 J3.18
UART1_DCD: length 8.8
  TOP w0.152: R11.1 27.24,35.41 28.61,34.04 31.29,34.04 v1(32.98,32.35) U2.5
UART1_DTR: length 41.2
  TOP w0.152: U2.6 v1(31.88,32.35) ; U7.3 67.45,36.82 67.06,37.21 65.15,37.21 64.9,37.47 64.9,37.82 64.62,38.1 v1(63.12,38.1)
  BOTTOM w0.152: v1(63.12,38.1) 61.21,36.2 35.22,36.2 31.88,32.86 v1(31.88,32.35)
UART1_DTR_T: length 10.3
  TOP w0.152: U7.18 78.12,36.82 78.61,36.32 80.24,36.32 J3.1
UART1_RTS: length 45.8
  TOP w0.152: U7.4 67.92,36.32 67.92,36.31 67.36,36.31 66.86,36.82 63.63,36.82 v1(63.51,36.7) ; R10.1 28.62,35.51 29.82,34.32 33.21,34.32 v1(35.18,32.35) U2.3
  BOTTOM w0.152: v1(35.18,32.35) 35.18,33.02 37.59,35.43 63.12,35.43 63.51,35.82 v1(63.51,36.7)
UART1_RTS_T: length 8
  TOP w0.152: J3.17 78.5,35.42 77.6,36.32 U7.17
UART1_RX: length 51.4
  TOP w0.152: R40.2 R41.2 v1(75.84,39.01) ; U2.2 v1(36.28,32.35) ; v1(64.64,36.06) 64.64,35.31 65.13,34.82 U7.7
  BOTTOM w0.152: v1(75.84,39.01) 75.18,38.35 71.5,38.35 71.12,38.73 69.55,38.73 69.54,38.73 69.12,38.73 69.11,38.73 66.55,38.73 64.64,36.83 v1(64.64,36.06) 63.64,35.05 38.48,35.05 36.28,32.86 v1(36.28,32.35)
UART1_RX_T: length 9
  TOP w0.152: U7.14 72.77,34.82 73.02,34.56 73.02,34.04 73.28,33.78 74.93,33.78 R44.1 76.57,33.41 J3.16
UART1_TX: length 44.9
  TOP w0.152: v1(65.66,35.43) 66.29,35.43 66.41,35.32 U7.6 ; v1(70.1,38.23) 70.1,38.99 71.46,40.34 U9.11 ; U2.1 v1(37.38,32.35)
  BOTTOM w0.152: v1(37.38,32.35) 37.38,33.19 38.73,34.54 63.5,34.54 63.75,34.8 v1(64.26,34.8) 64.9,35.43 v1(65.66,35.43) 65.66,37.08 66.8,38.23 v1(70.1,38.23)
UART1_TX_T: length 9.9
  TOP w0.152: v1(77.85,34.04) 76.57,35.32 U7.15
  BOTTOM w0.152: v1(77.85,34.04) 77.85,32.9 J3.15
UART2_RX: length 29.1
  TOP w0.152: R24.1 R28.2 44.82,19.82 45.09,19.56 v1(46.86,19.56) ; U2.23 v1(26.38,14.28)
  BOTTOM w0.152: v1(46.86,19.56) 46.86,17.65 44.07,14.86 26.96,14.86 v1(26.38,14.28)
UART2_TX: length 31.3
  TOP w0.152: U5.4 47.43,23.56 47.37,23.62 v1(46.86,23.62) ; U2.22 v1(25.28,14.28)
  BOTTOM w0.152: v1(25.28,14.28) 26.49,15.49 44.01,15.49 46.23,17.71 46.23,20.33 46.21,20.35 46.21,22.97 v1(46.86,23.62)
USB_DM: length 25.1
  TOP w0.127: v1(22.61,15.44) 22.29,15.12 21.64,15.12 21.13,14.61 21.13,13.83 21.71,13.26 28.44,13.26 29.3,14.12 29.3,14.43 29.42,14.56 29.55,14.56 29.68,14.69 U2.26 ; v1(20.93,15.75) 20.61,16.07 20.61,22.87 20.09,23.38 19.77,23.38 19.65,23.51 19.65,23.72 19.52,23.85 R14.1
  BOTTOM w0.127: v1(20.93,15.75) 20.61,15.43 20.61,15.25 20.73,15.12 22.29,15.12 v1(22.61,15.44)
USB_DP: length 23.5
  TOP w0.127: U2.25 28.58,14.69 28.71,14.56 28.84,14.56 28.97,14.43 28.97,14.25 28.3,13.59 21.84,13.59 21.46,13.97 21.46,14.48 21.78,14.79 22.29,14.79 v1(22.61,14.47) ; R15.1 19.52,22.58 19.65,22.71 19.65,22.92 19.77,23.05 19.95,23.05 20.28,22.73 20.28,16.07 v1(19.96,15.75)
  BOTTOM w0.127: v1(22.61,14.47) 22.29,14.79 20.6,14.79 20.28,15.11 20.28,15.43 v1(19.96,15.75)
USB_VBUS: length 24.5
  TOP w0.152: U3.4 v1(16.96,20.67)
  TOP w0.381: U2.24 v1(27.48,14.28)
  TOP w0.508: J5.1 v1(15.37,24.41)
  BOTTOM w0.381: v1(15.37,24.41) 15.37,23.11 16.96,21.52 v1(16.96,20.67) 16.96,16.44 19.81,13.6 26.8,13.6 v1(27.48,14.28)
WIFI_RST: length 43.7
  TOP w0.152: U6.1 52.63,54.05 52.33,54.36 46.94,54.36 46.63,54.05 U6.4 v1(46.63,50.32) ; U2.7 v1(30.78,32.35)
  BOTTOM w0.152: v1(46.63,50.32) 36.98,50.32 34.54,47.88 33.02,47.88 30.78,45.64 v1(30.78,32.35)
WIFI_RXD: length 21.9
  TOP w0.152: v1(49.53,28.07) 44.7,28.07 43.18,26.54 43.18,24.51 43.45,24.24 v1(45.85,24.24) ; v1(45.85,24.24) R30.1 ; v1(45.85,24.24) 47.13,24.24 47.31,24.06 U5.3 ; R23.2 v1(48.97,32.44)
  BOTTOM w0.152: v1(48.97,32.44) 50.08,31.32 50.08,28.62 v1(49.53,28.07)
WIFI_TXD: length 19.7
  TOP w0.152: R21.2 v1(52.83,32.57) ; U5.6 47.46,22.56 47.37,22.48 v1(46.86,22.48) ; v1(48.01,25.15) v1(48.01,27.43) ; R26.2 47.33,33.06 v1(48.01,32.39)
  BOTTOM w0.152: v1(46.86,22.48) 48.01,23.62 v1(48.01,25.15) ; v1(52.83,32.57) 52.38,33.02 48.64,33.02 v1(48.01,32.39) v1(48.01,27.43)
N10748: length 2.1
  TOP w0.152: U1.1 C1.1 R1.1
N10896: length 5.9
  TOP w0.152: R1.2 C2.1 L3.1 D1.1 J2.3 51.71,29.6
N18352: length 7
  TOP w0.152: Q1.1 25.57,39.83 26.08,39.32 28.58,39.32 30,37.89 R8.2
N18359: length 4.4
  TOP w0.152: R9.2 31.38,38.17 29.63,39.92 Q2.1
N18758: length 4.2
  TOP w0.152: Q1.3 v1(25.52,42.97)
  BOTTOM w0.152: v1(25.52,42.97) 23.83,41.28 R4.1
N18762: length 6.6
  TOP w0.152: Q2.3 v1(29.58,42.97)
  BOTTOM w0.152: R6.1 27.19,40.57 v1(29.58,42.97)
N16829767: length 4.3
  TOP w0.152: R2.2 C4.1 D2.1 J1.3
N16835858: length 2.1
  TOP w0.152: U2.57 v1(23.9,19.11)
  BOTTOM w0.254: v1(23.9,19.11) 24.11,19.32 R3.1
N16842007: length 22
  TOP w0.254: v1(9.48,18) 8.6,18 8.13,17.53 8.13,16.04 8.04,15.95 FB1.1
  BOTTOM w0.254: v1(13.78,18) v1(9.48,18) v1(9.48,27.63) v1(13.78,27.63)
N16842026: length 9.8
  TOP w0.127: R14.2 17.8,23.62 v1(16.38,23.62) J5.2 ; U3.3 v1(18.86,20.67)
  BOTTOM w0.127: v1(16.38,23.62) 17.02,23.62 18.86,21.78 v1(18.86,20.67)
N16842044: length 10.4
  TOP w0.127: U3.2 v1(18.86,18.65) ; J5.3 v1(16.89,22.81) 17.8,22.81 R15.2
  BOTTOM w0.127: v1(16.89,22.81) 17.91,21.8 17.91,19.6 v1(18.86,18.65)
N16846415: length 2.2
  TOP w0.152: U9.3 65.39,42.29 65.11,42.57 C25.1
N16846419: length 7.3
  TOP w0.152: C25.2 63.05,42.57 62.86,42.76 62.86,44.7 63.23,45.07 64.6,45.07 66.08,43.59 U9.1
N16846439: length 2.4
  TOP w0.152: C33.1 65.47,42.94 U9.2
N16846461: length 3.8
  TOP w0.152: C35.1 63.57,40.82 63.75,40.64 65.15,40.64 65.5,40.99 U9.5
N16846465: length 2.2
  TOP w0.152: U9.4 65.44,41.64 65.11,41.32 C35.2
N16846467: length 2.2
  TOP w0.152: C36.1 65.21,40.07 65.49,40.34 U9.6
N16847010: length 18.4
  TOP w0.152: v1(34.09,48.57) 33.84,48.82 R20.2 ; U6.3 v1(48.63,50.87)
  BOTTOM w0.152: v1(48.63,50.87) 36.38,50.87 v1(34.09,48.57)
N16847616: length 3.9
  TOP w0.152: C19.1 58.84,10.32 59.43,10.91 U8.1
N16847620: length 3.5
  TOP w0.152: C19.2 57.82,10.57 57.49,10.91 U8.8
N16847722: length 4.9
  TOP w0.152: D15.1 R33.1 63.32,13.81 62.97,13.45 U8.3
N16847724: length 5.9
  TOP w0.152: U8.6 56.97,13.45 57.15,13.63 57.15,16.14 C31.1 C34.1
N16847764: length 5.4
  TOP w0.152: C26.1 62.08,17.81 62.58,17.31 62.58,15.26 62.04,14.72 U8.4
N16847768: length 4.5
  TOP w0.152: R38.2 R34.1 54.09,16.04 54.08,16.04 54.08,15.06 54.43,14.72 U8.5
N16847850: length 1.2
  TOP w0.152: R37.2 C31.2
N16848451: length 4.7
  TOP w0.152: R43.2 R42.2 60.87,25.06 60.53,24.72 U10.4
N16862002: length 2.5
  TOP w0.152: R39.2 R35.1 R36.2
N16866018: length 8.4
  TOP w0.152: U6.16 40.63,35.19 41.25,34.57 R31.2 R26.1
N16866581: length 4.1
  TOP w0.152: U5.2 47.48,24.56 47.33,24.71 47.33,26.07 47.08,26.32 R22.1
N16867085: length 2.7
  TOP w0.152: R24.2 47.23,21.81 47.48,22.06 U5.7
N16887146: length 2.2
  TOP w0.152: R21.1 52.83,35.09 52.63,35.29 U6.22
N16887179: length 2.3
  TOP w0.152: R23.1 50.63,35.12 U6.21
N16887271: length 44.6
  TOP w0.152: v1(43.05,27.81) 42.69,27.45 42.69,23.85 43.18,23.37 R30.2 ; v1(42.52,32.87) 41.91,32.87 41.72,33.07 39.45,33.07 34.45,38.07 33.05,38.07 v1(32.13,38.99) ; U6.7 v1(40.63,49.57)
  BOTTOM w0.152: v1(43.05,27.81) 43.05,32.34 v1(42.52,32.87) ; v1(32.13,38.99) 32.13,45.77 33.48,47.12 34.42,47.12 36.87,49.57 v1(40.63,49.57)
N16887852: length 16.1
  TOP w0.152: U6.17 42.63,39.02 41.02,40.64 v1(38.99,40.64)
  BOTTOM w0.152: v1(38.99,40.64) 34.8,40.64 33.53,41.91 TP1.1
N16896165: length 1.4
  TOP w0.152: V5.1 R16.2
N16906839: length 2.4
  TOP w0.152: v1(22.57,41.82) 22.52,41.87 Q3.3
  BOTTOM w0.152: R7.1 v1(22.57,41.82)
N16906841: length 9.7
  TOP w0.152: Q3.1 21.51,39.92 22.61,38.82 27.83,38.82 28.62,38.03 R10.2
N16907220: length 4.3
  TOP w0.152: v1(19.58,42.57) 19.18,42.97 Q4.3
  BOTTOM w0.152: R5.1 21.32,41.42 20.17,42.57 v1(19.58,42.57)
N16907222: length 12.3
  TOP w0.152: Q4.1 17.44,39.71 18.83,38.32 26.58,38.32 27.24,37.66 R11.2
N16956523: length 6.5
  TOP w0.152: J3.3 80.3,32.39 77.2,32.39 76.44,33.15 R12.2
N17025201: length 1.8
  TOP w0.152: R40.1 74.09,41.07 74.01,40.99 U9.12
N17037446: length 3.6
  TOP w0.254: 49.91,32.13 49.4,31.62 49.07,31.62 L3.2 47.7,31.88 47.12,31.88

## Copper pours and planes (outline as drawn; the poured copper is in the pictures)
GND on TOP (solid shape): 40.13,5.97 37.21,5.97 37.21,13.21 40.13,13.21
GND on TOP (solid shape): 70.83,25.57 70.83,23.06 70.58,22.81 64.58,22.81 64.33,23.06 64.33,25.57 64.58,25.82 70.58,25.82
GND on TOP (solid shape): 77.58,26.82 77.58,23.56 77.08,23.06 75.83,23.06 75.33,23.56 75.33,26.82 75.83,27.32 77.08,27.32
GND on TOP (solid shape): 71.08,15.31 71.08,13.81 70.83,13.56 69.58,13.56 69.33,13.31 69.33,12.06 68.83,11.56 67.08,11.56 66.58,12.06 66.58,14.56 67.58,15.56 70.83,15.56
GND on TOP (solid shape): 59.82,15.62 59.82,11.68 59.56,11.43 57.28,11.43 56.9,11.81 54.23,11.81 54.1,11.94 54.1,12.45 54.23,12.57 57.53,12.57 57.78,12.83 57.78,15.49 58.04,15.75 59.69,15.75
GND on BOTTOM (solid shape): 40.13,5.97 37.21,5.97 37.21,13.21 40.13,13.21
GND on GND: 14.48,4.83 5.84,13.46 5.84,54.1 49.28,54.1 49.28,36.45 63.25,36.45 63.25,44.96 82.93,44.96 82.93,13.46 69.58,13.46 69.58,4.83
VCC_3V3 on TOP (solid shape): 62.36,32.39 62.36,26.8 62.1,26.54 60.2,26.54 60.2,32.39 60.71,32.89 61.85,32.89
VCC_3V3 on VCC: 14.19,4.32 5.33,13.17 5.33,54.81 49.91,54.81 49.91,36.45 65.53,36.45 65.53,46.31 83.33,46.31 83.33,13.07 69.58,13.07 69.58,4.32
VCC_4V on TOP (solid shape): 41.58,19.81 42.04,19.81 42.29,19.56 42.29,17.4 43.38,16.31 47.08,16.31 48.08,15.31 48.08,9.06 49.58,7.56 49.58,5.56 49.33,5.31 42.33,5.31 41.83,5.81 41.83,13.79 39.33,16.29 39.33,20.06 39.58,20.31 41.08,20.31
VCC_4V on BOTTOM (solid shape): 45.09,5.97 42.04,5.97 42.04,13.34 45.09,13.34
VCC_IN on TOP (solid shape): 80.08,26.07 80.08,17.81 79.08,16.81 75.58,16.81 74.83,16.06 74.83,14.31 74.33,13.81 72.58,13.81 72.08,14.31 72.08,17.56 72.83,18.31 74.83,18.31 75.08,18.56 75.08,22.56 77.58,22.56 78.33,23.31 78.33,25.82 78.83,26.32 79.83,26.32
VCC_IN_F on TOP (solid shape): 73.58,26.07 73.58,22.56 73.33,22.31 73.33,19.56 73.08,19.31 71.58,19.31 70.58,18.31 70.58,17.31 70.33,17.06 67.08,17.06 65.58,15.56 65.58,11.81 65.33,11.56 62.58,11.56 62.33,11.81 60.83,11.81 60.58,12.06 60.58,12.31 60.83,12.56 63.33,12.56 64.33,13.56 64.33,19.06 64.08,19.31 64.08,20.81 64.33,21.06 70.83,21.06 71.08,21.31 71.08,22.31 71.83,23.06 71.83,26.07 72.08,26.32 73.33,26.32
N16847620 on TOP (solid shape): 53.34,13.84 53.34,11.56 53.59,11.3 56.64,11.3 56.9,11.05 56.9,10.54 55.63,9.27 55.63,5.59 55.37,5.33 53.09,5.33 52.83,5.59 52.83,8.38 52.45,8.76 50.8,8.76 49.78,9.78 49.78,13.84 50.04,14.1 53.09,14.1
N16848391 on TOP (solid shape): 57.91,29.72 57.91,26.67 59.05,25.53 59.05,23.5 58.93,23.37 58.29,23.37 55.88,25.78 55.88,29.72 56.13,29.97 57.66,29.97

## Text on the board
Ref Des/Silkscreen Bottom: GPS | GPRS
Ref Des/Silkscreen Top: X.U | DB_TX | V2.0.1 | 2017-4
COMPVAL_TYPE_TOP: 3/4 V-CUT
BODY_CENTER: FIGURE | FINISHED_SIZE | 12.0 | 32.0 | 40.0 | 106.299 | 125.984 | DRILL CHART: TOP to BOTTOM | ALL UNITS ARE IN MILS | PLATED | QTY | 363 | 33 | 1 | 4 | 5
